# Altium PCB Shield_MMA8452_rouge.PcbDoc
Units mm, origin at the board's own origin, x right, y up, seen from the top; angles counter-clockwise.
Board outline 70 x 57.5 mm, 4 copper layers (Top Layer, Internal Plane 1, Internal Plane 2, Bottom Layer), stack 0.462 mm thick; 7 components, 6 nets, 114 pads, 0 vias.
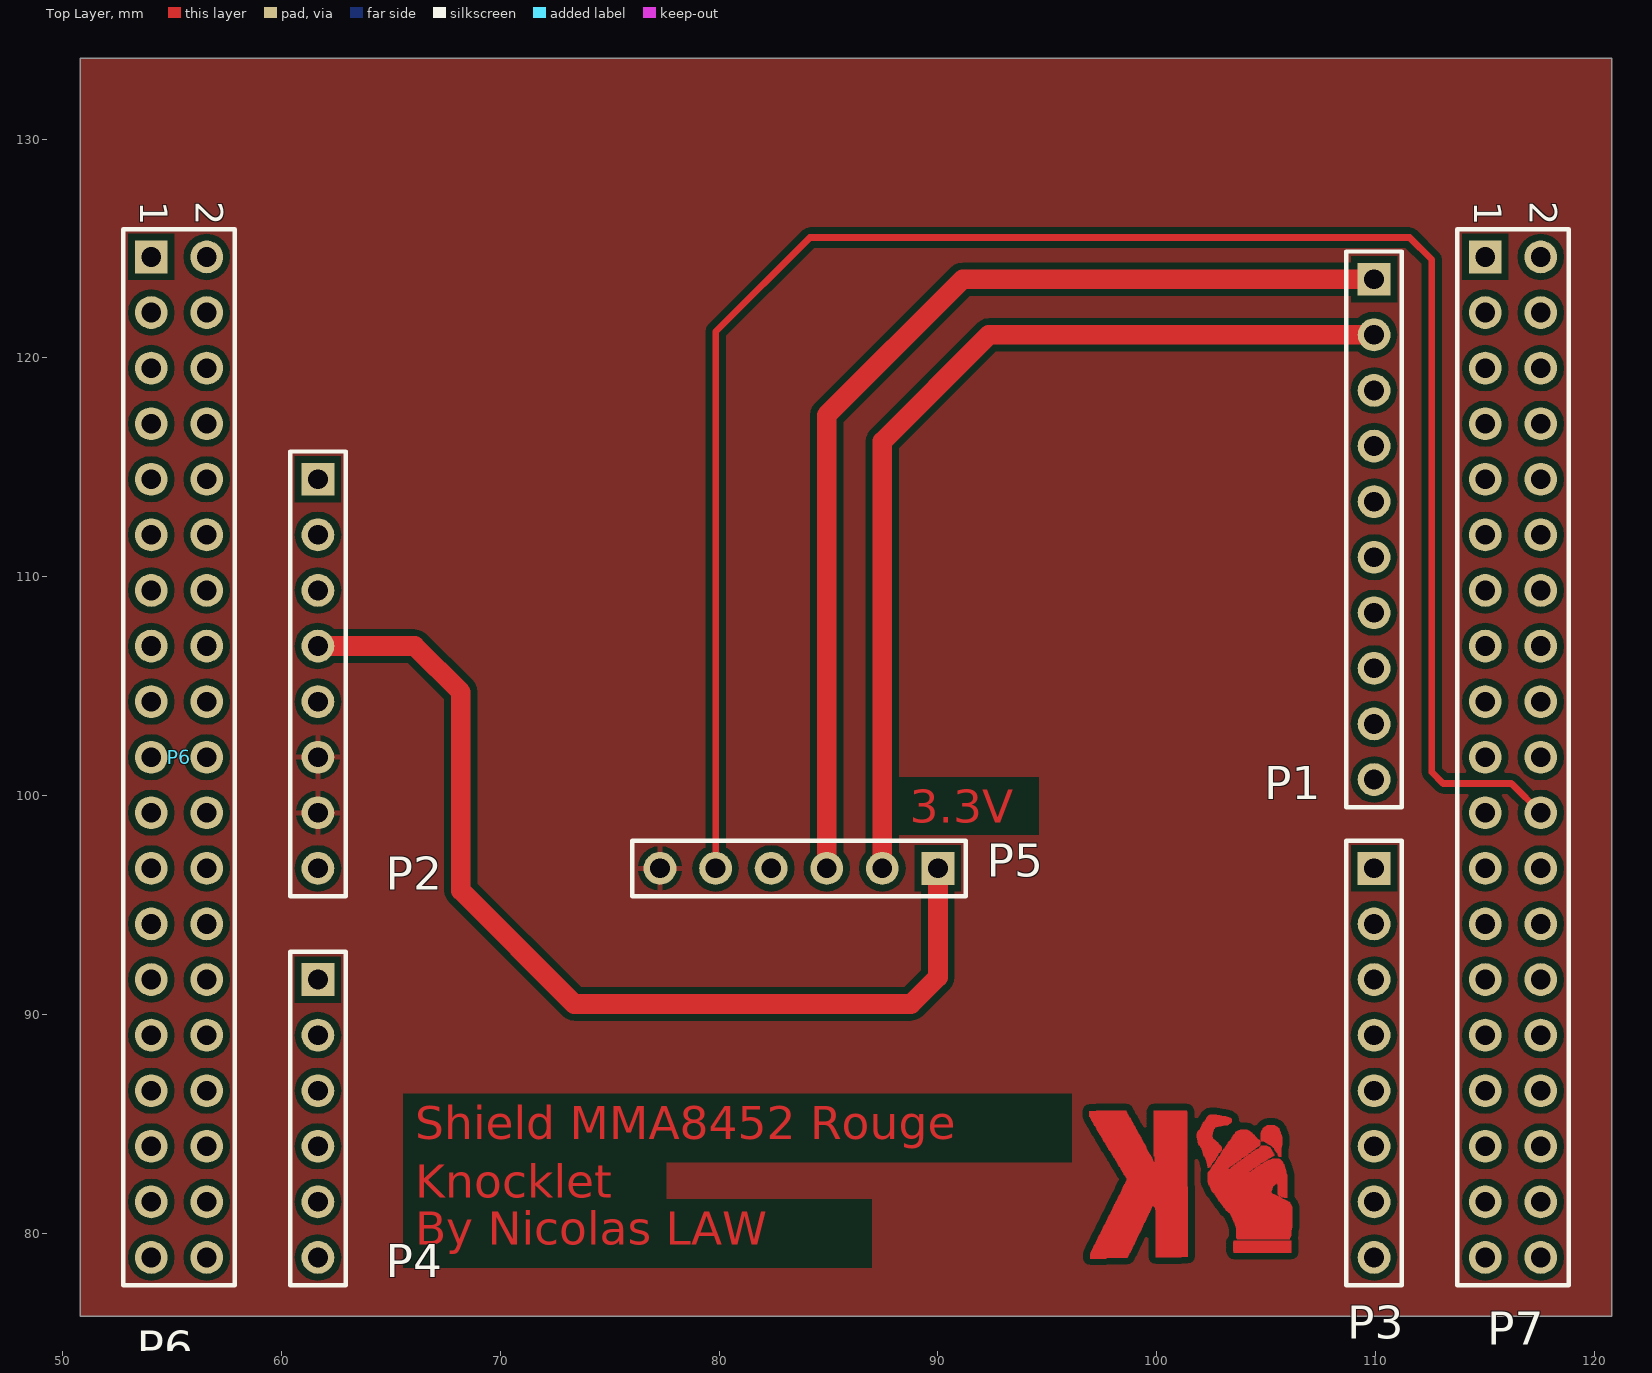
[diagram p0: Top Layer view]
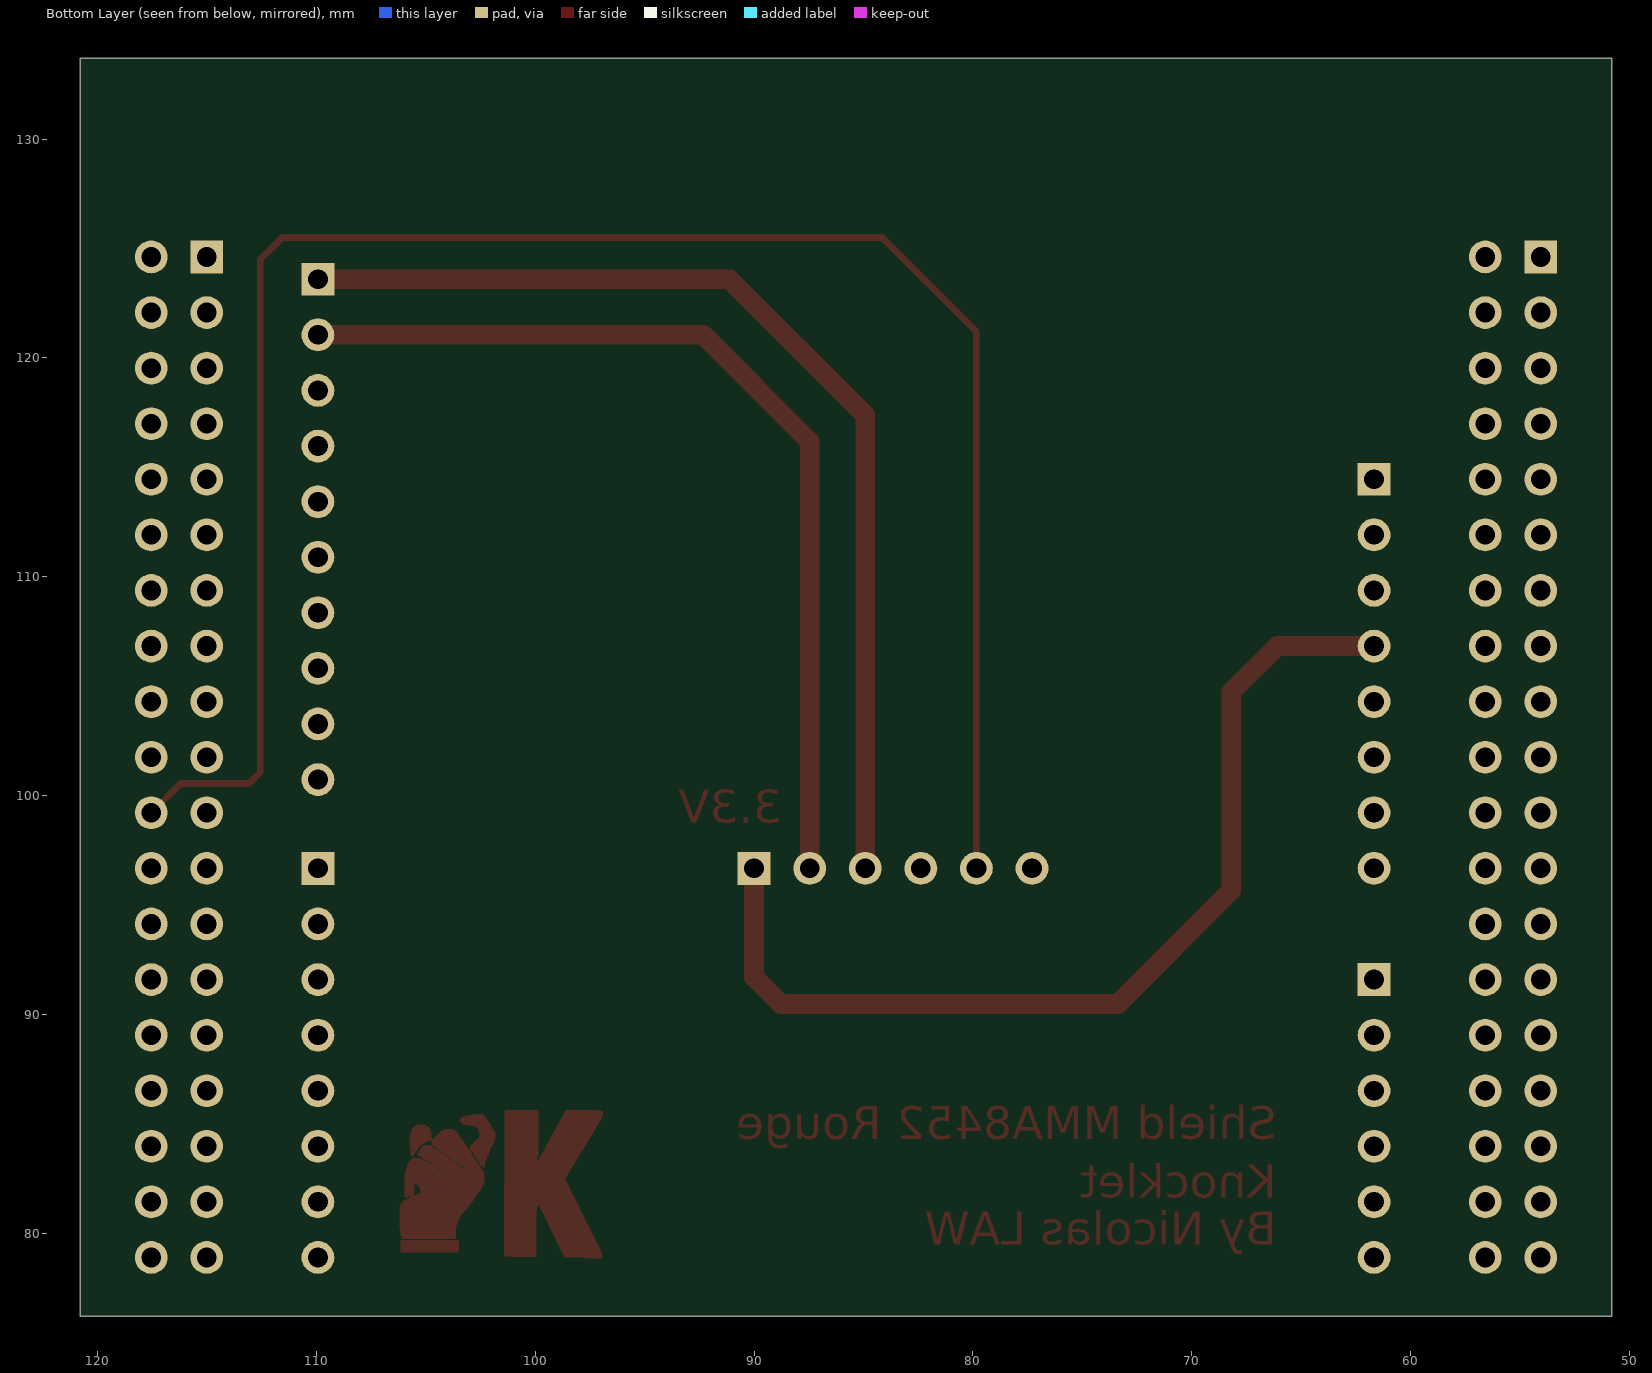
[diagram p1: Bottom Layer view, seen from below]
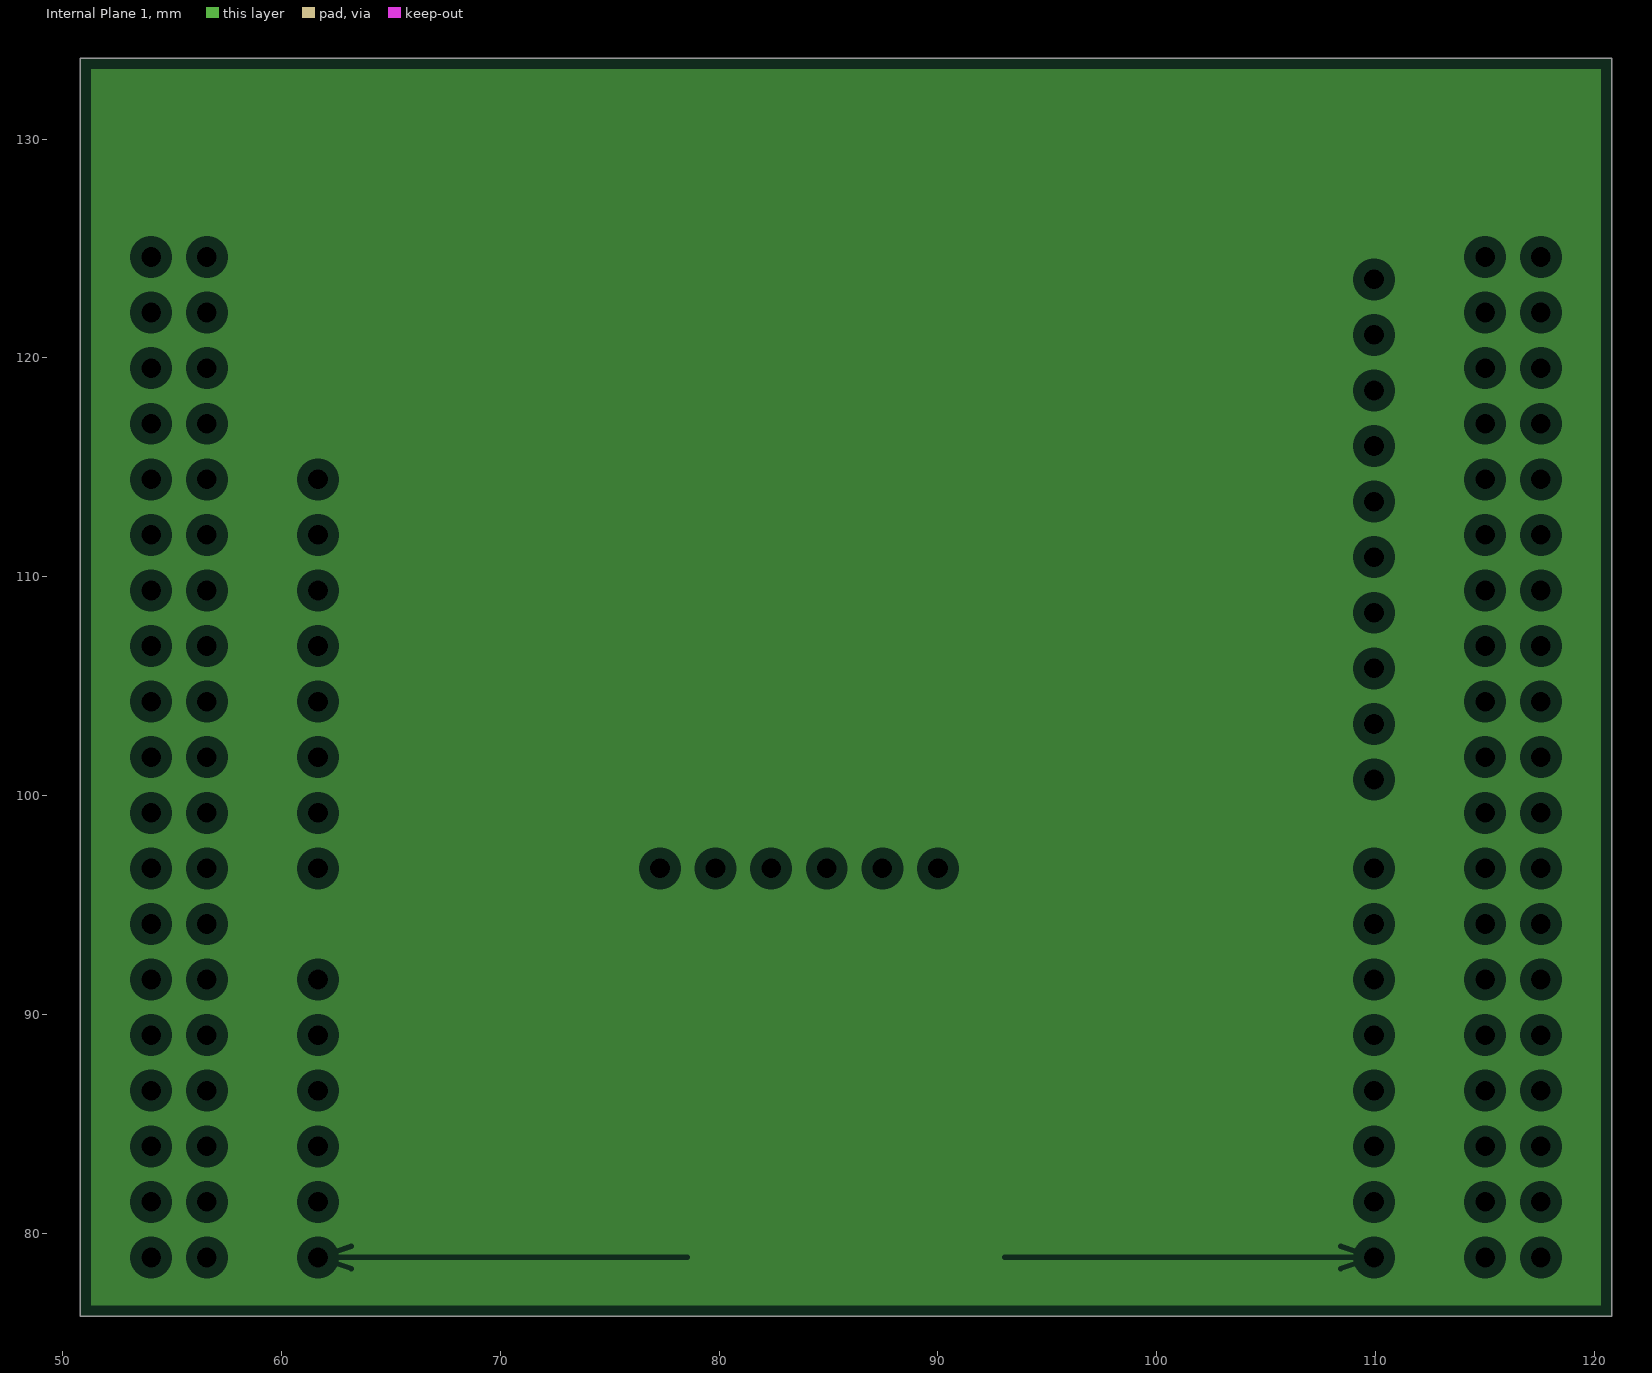
[diagram p2: Internal Plane 1, clearances drawn from the general rule]
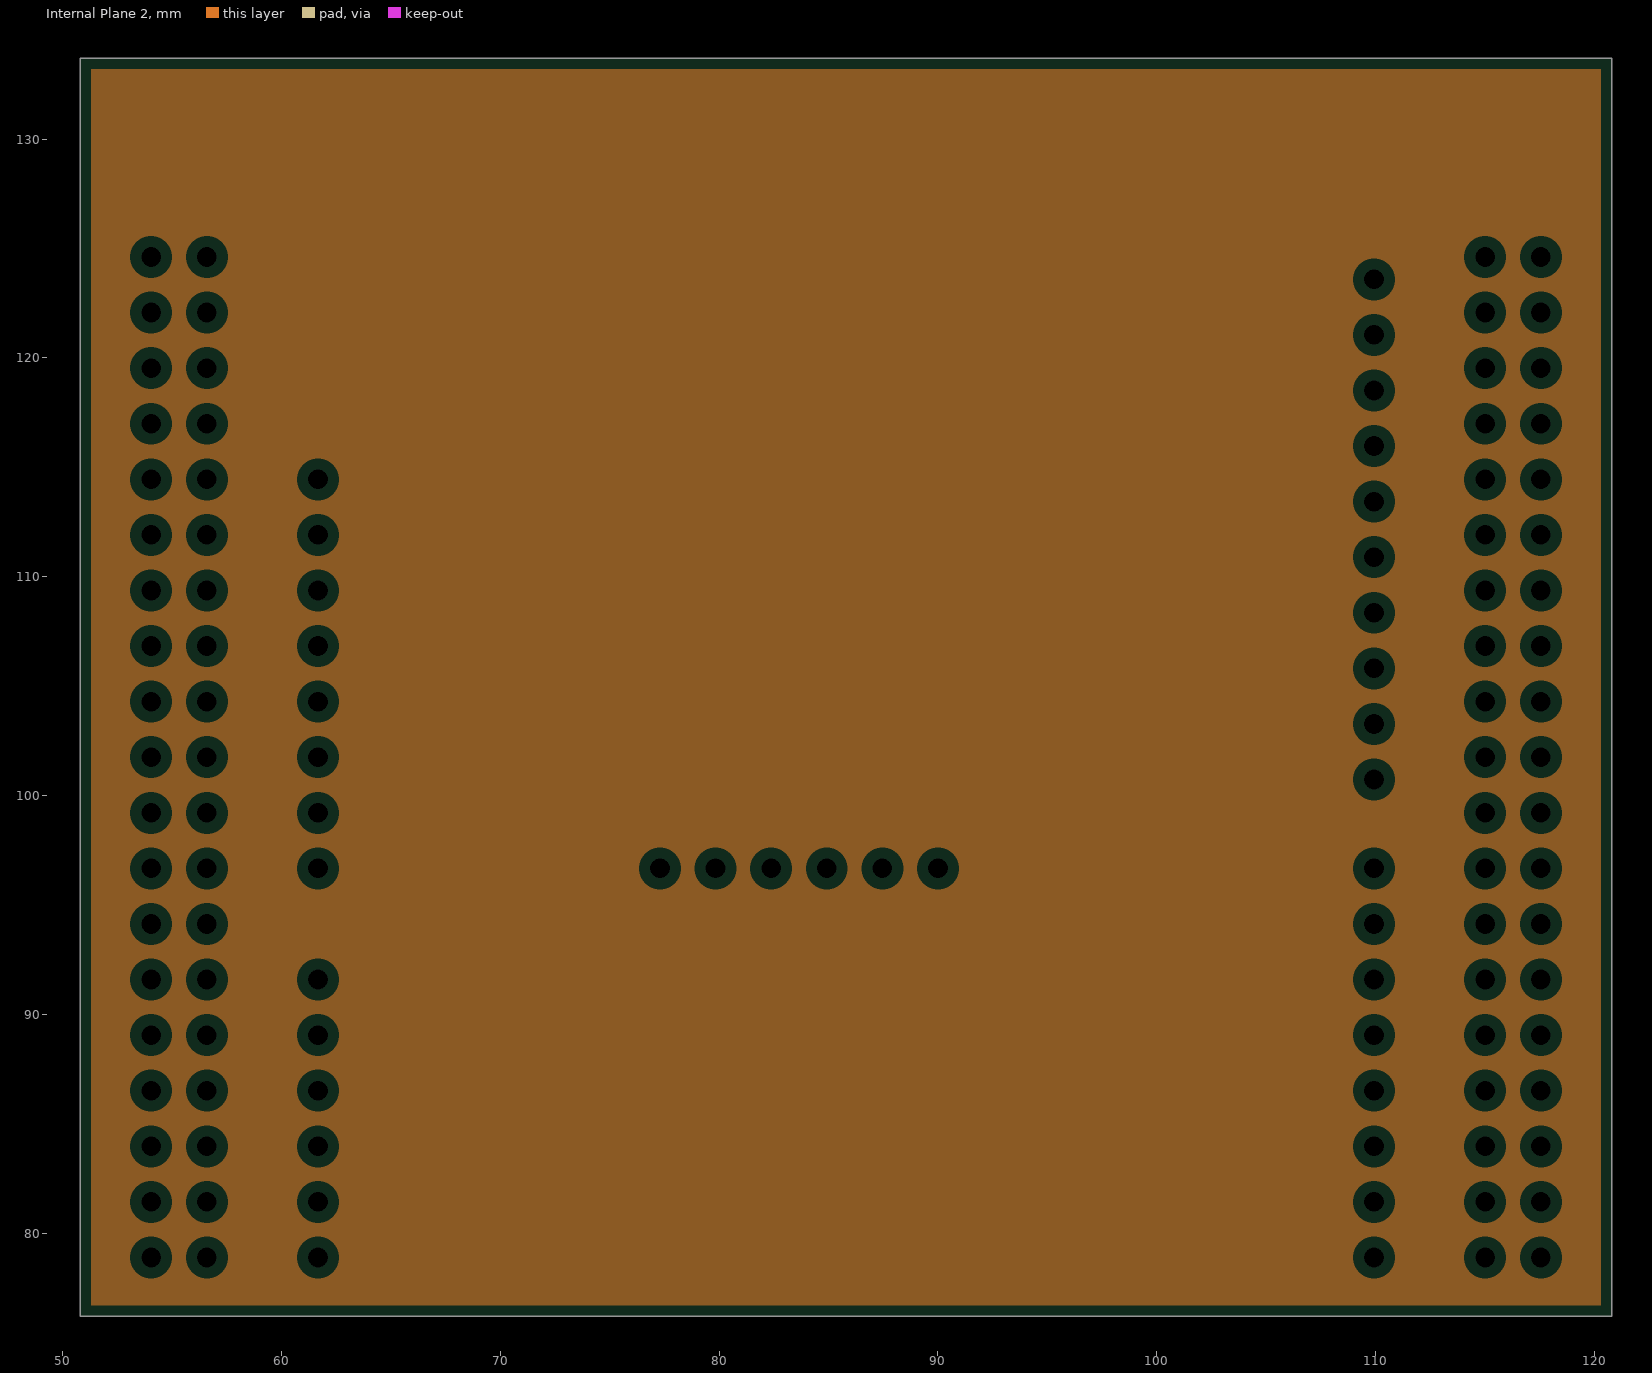
[diagram p3: Internal Plane 2, clearances drawn from the general rule]

## Layer stack, top to bottom
Top Solder: solder mask 0.0102, Solder Resist, Dk 3.5
Top Layer: signal copper 0.0356
Internal Plane 1: plane copper 0.0356
Internal Plane 2: plane copper 0.0356
Dielectric 1: dielectric 0.32, FR-4, Dk 4.8
Bottom Layer: signal copper 0.0356
Bottom Solder: solder mask 0.0102, Solder Resist, Dk 3.5

## Board outline
50.8,76.2 120.8,76.2 120.8,133.7 50.8,133.7

## Design rules (kind name [scope] priority, off if disabled: settings)
Clearance [All] p1: gap=0.3 ignorepadtopadclearanceinfootprint=FALSE except(0: Arc-Hole Track-Hole SMDPad-Hole THPad-Hole Via-Hole Fill-Hole Poly-Hole Region-Hole Text-Hole)
PlaneClearance [All] p1: clearance=0.508
PlaneConnect [All] p1: planeconnectstyle=Relief reliefexpansion=0.508 reliefentries=4 reliefconductorwidth=0.254 reliefairgap=0.254
PolygonConnect [All] p1: connectstyle=Relief reliefconductorwidth=0.254 reliefentries=4 polygonreliefangle="90 Angle" airgapwidth=0.254
RoutingVias [All] p1: holewidth=0.8 width=1.6 viastyle="Through Hole" minholewidth=0.711 minwidth=1.27 maxholewidth=0.711 maxwidth=1.27
SolderMaskExpansion [All] p1: expansion=0.102
Width [All] p1: maxlimit=0.9 minlimit=0.3 preferedwidth=0.3 bottomlayer_maxwidth=0.3 minimp=50.000000 maximp=50.000000 favimp=50.000000
28 further rules are at their usual default settings.

## Classes and differential pairs
component class Shield_MMA8452_rouge: P2 P3 P4 P6 P7

## Components (designator, comment, footprint, x,y, rotation, side; value= is the part's Value field where it differs from the comment)
P1 "CN5" HDR1X10 109.93,123.592 r270 top
P2 "CN6" HDR1X8 61.67,114.452 r270 top
P3 "CN9" HDR1X8 109.93,96.672 r270 top
P4 "CN8" HDR1X6 61.67,91.592 r270 top
P5 "MMA8452" HDR1X6 90,96.672 r180 top
P6 "CN7" HDR2X19 54.05,124.612 r270 top
P7 "CN10" HDR2X19 115.01,124.612 r270 top

## Footprints (in the part's own frame and the unit in brackets; to place one, negate y for a bottom-side part, rotate by r counter-clockwise, add the part's x,y. Pads: shape width x height; smd on the part's side, far side on the other; paste and mask are expansions set on the pad)
HDR1X6 [mm] "Connector; Header; 6 Position"
  rect 1.5x1.5 hole 0.9: 1(0,0)
  round 1.5 hole 0.9: 2(2.54,0) 3(5.08,0) 4(7.62,0) 5(10.16,0) 6(12.7,0)
  silkscreen extent -1.27,-1.27 13.97,1.27
HDR1X8 [mm] "Connector; Header; 8 Position"
  rect 1.5x1.5 hole 0.9: 1(0,0)
  round 1.5 hole 0.9: 2(2.54,0) 3(5.08,0) 4(7.62,0) 5(10.16,0) 6(12.7,0) 7(15.24,0) 8(17.78,0)
  silkscreen extent -1.27,-1.27 19.05,1.27
HDR1X10 [mm] "Connector; Header; 10 Position"
  rect 1.5x1.5 hole 0.9: 1(0,0)
  round 1.5 hole 0.9: 2(2.54,0) 3(5.08,0) 4(7.62,0) 5(10.16,0) 6(12.7,0) 7(15.24,0) 8(17.78,0) 9(20.32,0) 10(22.86,0)
  silkscreen extent -1.27,-1.27 24.13,1.27
HDR2X19 [mm] "Connector; Header; 19x2 Position"
  rect 1.5x1.5 hole 0.9: 1(0,0)
  round 1.5 hole 0.9: 2(0,2.54) 3(2.54,0) 4(2.54,2.54) 5(5.08,0) 6(5.08,2.54) 7(7.62,0) 8(7.62,2.54) 9(10.16,0) 10(10.16,2.54) 11(12.7,0) 12(12.7,2.54) 13(15.24,0) 14(15.24,2.54) 15(17.78,0) 16(17.78,2.54) 17(20.32,0) 18(20.32,2.54) 19(22.86,0) 20(22.86,2.54) 21(25.4,0) 22(25.4,2.54) 23(27.94,0) 24(27.94,2.54) 25(30.48,0) 26(30.48,2.54) 27(33.02,0) 28(33.02,2.54) 29(35.56,0) 30(35.56,2.54) 31(38.1,0) 32(38.1,2.54) 33(40.64,0) 34(40.64,2.54) 35(43.18,0) 36(43.18,2.54) 37(45.72,0) 38(45.72,2.54)
  silkscreen extent -1.27,-1.27 46.99,3.81

## Part data
P1: library part "Header 10", "Header, 10-Pin"
P2 P3: library part "Header 8", "Header, 8-Pin"
P4 P5: library part "Header 6", "Header, 6-Pin"
P6 P7: library part "Header 19X2", "Header, 19-Pin, Dual row"

## Nets (pads, with @x,y where several pads share a name; then routed paths per layer and width w, separated by ;. In a path a pad name is that pad's centre, name@x,y a point inside that pad or via, vN(x,y) a via of type N, cw(c..) or ccw(c..) an arc to the next point about the centre after c; other vN are vias at no path point)
3.3V: P2.4 P5.1 | length 45.9
  Top Layer w0.9: P2.4 66.091,106.832 68.199,104.724 68.199,95.656 73.381,90.475 88.773,90.475 90,91.702 P5.1
GND: P2.6 P2.7 P5.6
INT1: P5.5 P7.22 | length 88.6
  Top Layer w0.3: P5.5 79.84,121.191 84.15,125.501 111.557,125.501 112.573,124.485 112.573,101.067 113.087,100.552 116.21,100.552 P7.22
INT2: P5.4
SCL: P1.1 P5.3 | length 48.3
  Top Layer w0.9: P5.3 84.92,117.381 91.131,123.592 P1.1
SDA: P1.2 P5.2 | length 44
  Top Layer w0.9: P5.2 87.46,116.187 92.325,121.052 P1.2
pads on no net: P1.3 P1.4 P1.5 P1.6 P1.7 P1.8 P1.9 P1.10 P2.1 P2.2 P2.3 P2.5 P2.8 P3.1 P3.2 P3.3 P3.4 P3.5 P3.6 P3.7 P3.8 P4.1 P4.2 P4.3 P4.4 P4.5 P4.6 P6.1 P6.2 P6.3 P6.4 P6.5 P6.6 P6.7 P6.8 P6.9 P6.10 P6.11 P6.12 P6.13 P6.14 P6.15 P6.16 P6.17 P6.18 P6.19 P6.20 P6.21 P6.22 P6.23 P6.24 P6.25 P6.26 P6.27 P6.28 P6.29 P6.30 P6.31 P6.32 P6.33 P6.34 P6.35 P6.36 P6.37 P6.38 P7.1 P7.2 P7.3 P7.4 P7.5 P7.6 P7.7 P7.8 P7.9 P7.10 P7.11 P7.12 P7.13 P7.14 P7.15 P7.16 P7.17 P7.18 P7.19 P7.20 P7.21 P7.23 P7.24 P7.25 P7.26 P7.27 P7.28 P7.29 P7.30 P7.31 P7.32 P7.33 P7.34 P7.35 P7.36 P7.37 P7.38
copper on no net: | length 1528.3
  Top Layer w0.025: 96.926,85.344 98.73,85.344 ; 96.926,85.369 98.73,85.369 ; 96.926,85.395 98.704,85.395 ; 96.926,85.42 98.704,85.42 ; 96.926,85.446 98.679,85.446 ; 96.926,85.471 98.654,85.471 ; 96.926,85.496 98.654,85.496 ; 96.926,85.522 98.628,85.522 ; 96.926,85.547 98.628,85.547 ; 96.926,85.573 98.603,85.573 ; 96.952,78.867 97.688,78.867 ; 96.952,78.892 98.654,78.892 ; 96.952,78.918 98.679,78.918 ; 96.952,78.943 98.679,78.943 ; 96.952,78.969 98.704,78.969 ; 96.952,78.994 98.704,78.994 ; 96.952,79.019 98.73,79.019 ; 96.952,79.045 98.73,79.045 ; 96.952,79.07 98.755,79.07 ; 96.952,85.293 98.755,85.293 ; 96.952,85.319 98.755,85.319 ; 96.977,79.096 98.755,79.096 ; 96.977,79.121 98.781,79.121 ; 96.977,85.242 98.806,85.242 ; 96.977,85.268 98.781,85.268 ; 97.003,79.146 98.781,79.146 ; 97.003,79.172 98.806,79.172 ; 97.003,85.192 98.831,85.192 ; 97.003,85.217 98.806,85.217 ; 97.028,79.197 98.806,79.197 ; 97.028,79.223 98.831,79.223 ; 97.028,85.166 98.831,85.166 ; 97.053,79.248 98.831,79.248 ; 97.053,79.273 98.857,79.273 ; 97.053,85.115 98.857,85.115 ; 97.053,85.141 98.857,85.141 ; 97.079,79.299 98.857,79.299 ; 97.079,79.324 98.882,79.324 ; 97.079,85.09 98.882,85.09 ; 97.104,79.35 98.882,79.35 ; 97.104,79.375 98.908,79.375 ; 97.104,85.039 98.908,85.039 ; 97.104,85.065 98.908,85.065 ; 97.13,79.4 98.908,79.4 ; 97.13,79.426 98.933,79.426 ; 97.13,84.988 98.933,84.988 ; 97.13,85.014 98.933,85.014 ; 97.155,79.451 98.933,79.451 ; 97.155,79.477 98.958,79.477 ; 97.155,84.938 98.958,84.938 ; 97.155,84.963 98.958,84.963 ; 97.18,79.502 98.958,79.502 ; 97.18,79.527 98.984,79.527 ; 97.18,84.912 98.984,84.912 ; 97.206,79.553 98.984,79.553 ; 97.206,79.578 98.984,79.578 ; 97.206,84.861 99.009,84.861 ; 97.206,84.887 98.984,84.887 ; 97.231,79.604 99.009,79.604 ; 97.231,79.629 99.009,79.629 ; 97.231,84.811 99.035,84.811 ; 97.231,84.836 99.009,84.836 ; 97.231,85.598 98.603,85.598 ; 97.257,79.654 99.035,79.654 ; 97.257,79.68 99.035,79.68 ; 97.257,84.76 99.06,84.76 ; 97.257,84.785 99.035,84.785 ; 97.282,79.705 99.06,79.705 ; 97.282,79.731 99.06,79.731 ; 97.282,84.709 99.085,84.709 ; 97.282,84.734 99.085,84.734 ; 97.307,79.756 99.085,79.756 ; 97.307,79.781 99.085,79.781 ; 97.307,84.684 99.111,84.684 ; 97.333,79.807 99.111,79.807 ; 97.333,79.832 99.111,79.832 ; 97.333,84.633 99.136,84.633 ; 97.333,84.658 99.111,84.658 ; 97.358,79.858 99.136,79.858 ; 97.358,79.883 99.136,79.883 ; 97.358,84.607 99.136,84.607 ; 97.384,79.908 99.162,79.908 ; 97.384,79.934 99.162,79.934 ; 97.384,84.557 99.187,84.557 ; 97.384,84.582 99.162,84.582 ; 97.409,79.959 99.187,79.959 ; 97.409,79.985 99.187,79.985 ; 97.409,84.506 99.212,84.506 ; 97.409,84.531 99.187,84.531 ; 97.434,80.01 99.212,80.01 ; 97.434,80.035 99.212,80.035 ; 97.434,84.48 99.212,84.48 ; 97.46,80.061 99.238,80.061 ; 97.46,80.086 99.238,80.086 ; 97.46,84.43 99.238,84.43 ; 97.46,84.455 99.238,84.455 ; 97.485,80.112 99.263,80.112 ; 97.485,80.137 99.263,80.137 ; 97.485,84.379 99.289,84.379 ; 97.485,84.404 99.263,84.404 ; 97.511,80.162 99.289,80.162 ; 97.511,80.188 99.289,80.188 ; 97.511,84.353 99.289,84.353 ; 97.536,80.213 99.314,80.213 ; 97.536,80.239 99.314,80.239 ; 97.536,84.303 99.314,84.303 ; 97.536,84.328 99.314,84.328 ; 97.561,80.264 99.339,80.264 ; 97.561,80.289 99.339,80.289 ; 97.561,84.252 99.339,84.252 ; 97.561,84.277 99.339,84.277 ; 97.587,80.315 99.365,80.315 ; 97.587,80.34 99.365,80.34 ; 97.587,84.201 99.365,84.201 ; 97.587,84.226 99.365,84.226 ; 97.612,80.366 99.365,80.366 ; 97.612,80.391 99.39,80.391 ; 97.612,84.176 99.39,84.176 ; 97.638,80.416 99.39,80.416 ; 97.638,80.442 99.416,80.442 ; 97.638,84.125 99.416,84.125 ; 97.638,84.15 99.39,84.15 ; 97.663,80.467 99.416,80.467 ; 97.663,80.493 99.441,80.493 ; 97.663,84.074 99.441,84.074 ; 97.663,84.099 99.441,84.099 ; 97.688,80.518 99.441,80.518 ; 97.688,80.543 99.466,80.543 ; 97.688,84.049 99.466,84.049 ; 97.714,80.569 99.466,80.569 ; 97.714,80.594 99.492,80.594 ; 97.714,83.998 99.492,83.998 ; 97.714,84.023 99.466,84.023 ; 97.739,80.62 99.492,80.62 ; 97.739,80.645 99.517,80.645 ; 97.739,83.947 99.517,83.947 ; 97.739,83.972 99.492,83.972 ; 97.765,80.67 99.517,80.67 ; 97.765,80.696 99.543,80.696 ; 97.765,83.922 99.517,83.922 ; 97.79,80.721 99.543,80.721 ; 97.79,80.747 99.568,80.747 ; 97.79,83.871 99.543,83.871 ; 97.79,83.896 99.517,83.896 ; 97.815,80.772 99.568,80.772 ; 97.815,80.797 99.593,80.797 ; 97.815,83.845 99.543,83.845 ; 97.841,80.823 99.593,80.823 ; 97.841,80.848 99.619,80.848 ; 97.841,83.795 99.568,83.795 ; 97.841,83.82 99.568,83.82 ; 97.866,80.874 99.619,80.874 ; 97.866,80.899 99.644,80.899 ; 97.866,83.769 99.593,83.769 ; 97.892,80.924 99.644,80.924 ; 97.892,80.95 99.67,80.95 ; 97.892,83.718 99.619,83.718 ; 97.892,83.744 99.593,83.744 ; 97.917,80.975 99.67,80.975 ; 97.917,81.001 99.67,81.001 ; 97.917,83.693 99.644,83.693 ; 97.942,81.026 99.695,81.026 ; 97.942,81.051 99.695,81.051 ; 97.942,83.642 99.67,83.642 ; 97.942,83.668 99.644,83.668 ; 97.968,81.077 99.72,81.077 ; 97.968,81.102 99.72,81.102 ; 97.968,83.617 99.67,83.617 ; 97.993,81.128 99.746,81.128 ; 97.993,81.153 99.746,81.153 ; 97.993,83.566 99.72,83.566 ; 97.993,83.591 99.695,83.591 ; 98.019,81.178 99.771,81.178 ; 98.019,81.204 99.771,81.204 ; 98.019,83.515 99.746,83.515 ; 98.019,83.541 99.72,83.541 ; 98.044,81.229 99.797,81.229 ; 98.044,81.255 99.797,81.255 ; 98.044,83.464 99.771,83.464 ; 98.044,83.49 99.746,83.49 ; 98.069,81.28 99.822,81.28 ; 98.069,81.305 101.422,81.305 ; 98.069,81.331 101.422,81.331 ; 98.069,83.439 99.797,83.439 ; 98.095,81.356 101.422,81.356 ; 98.095,81.382 101.422,81.382 ; 98.095,83.388 99.822,83.388 ; 98.095,83.414 99.797,83.414 ; 98.12,81.407 101.422,81.407 ; 98.12,81.432 101.422,81.432 ; 98.12,83.337 99.822,83.337 ; 98.12,83.363 99.822,83.363 ; 98.146,81.458 101.422,81.458 ; 98.146,83.312 99.847,83.312 ; 98.171,81.483 101.422,81.483 ; 98.171,81.509 101.422,81.509 ; 98.171,83.261 99.873,83.261 ; 98.171,83.287 99.847,83.287 ; 98.196,81.534 101.422,81.534 ; 98.196,81.559 101.422,81.559 ; 98.196,83.21 101.397,83.21 ; 98.196,83.236 101.397,83.236 ; 98.222,81.585 101.422,81.585 ; 98.222,81.61 101.422,81.61 ; 98.222,83.185 101.397,83.185 ; 98.247,81.636 101.422,81.636 ; 98.247,81.661 101.422,81.661 ; 98.247,83.134 101.397,83.134 ; 98.247,83.16 101.397,83.16 ; 98.273,81.686 101.422,81.686 ; 98.273,81.712 101.422,81.712 ; 98.273,83.083 101.397,83.083 ; 98.273,83.109 101.397,83.109 ; 98.298,81.737 101.422,81.737 ; 98.298,81.763 101.422,81.763 ; 98.298,83.058 101.397,83.058 ; 98.323,81.788 101.422,81.788 ; 98.323,81.813 101.422,81.813 ; 98.323,83.007 101.397,83.007 ; 98.323,83.033 101.397,83.033 ; 98.349,81.839 101.422,81.839 ; 98.349,81.864 101.422,81.864 ; 98.349,82.956 101.397,82.956 ; 98.349,82.982 101.397,82.982 ; 98.374,81.89 101.422,81.89 ; 98.374,81.915 101.422,81.915 ; 98.374,82.931 101.397,82.931 ; 98.4,81.94 101.422,81.94 ; 98.4,81.966 101.422,81.966 ; 98.4,81.991 101.422,81.991 ; 98.4,82.88 101.397,82.88 ; 98.4,82.906 101.397,82.906 ; 98.425,82.017 101.422,82.017 ; 98.425,82.042 101.422,82.042 ; 98.425,82.829 101.397,82.829 ; 98.425,82.855 101.397,82.855 ; 98.45,82.067 101.422,82.067 ; 98.45,82.093 101.422,82.093 ; 98.45,82.804 101.397,82.804 ; 98.476,82.118 101.422,82.118 ; 98.476,82.144 101.397,82.144 ; 98.476,82.753 101.397,82.753 ; 98.476,82.779 101.397,82.779 ; 98.501,82.169 101.397,82.169 ; 98.501,82.194 101.397,82.194 ; 98.501,82.702 101.397,82.702 ; 98.501,82.728 101.397,82.728 ; 98.527,82.22 101.397,82.22 ; 98.527,82.245 101.397,82.245 ; 98.527,82.677 101.397,82.677 ; 98.552,82.271 101.397,82.271 ; 98.552,82.296 101.397,82.296 ; 98.552,82.626 101.397,82.626 ; 98.552,82.652 101.397,82.652 ; 98.577,82.321 101.397,82.321 ; 98.577,82.347 101.397,82.347 ; 98.577,82.575 101.397,82.575 ; 98.577,82.601 101.397,82.601 ; 98.603,82.372 101.397,82.372 ; 98.603,82.398 101.397,82.398 ; 98.603,82.55 101.397,82.55 ; 98.628,82.423 101.397,82.423 ; 98.628,82.448 101.397,82.448 ; 98.628,82.474 101.397,82.474 ; 98.628,82.499 101.397,82.499 ; 98.628,82.525 101.397,82.525 ; 99.847,81.28 101.422,81.28 ; 99.873,81.229 101.422,81.229 ; 99.873,81.255 101.422,81.255 ; 99.873,83.541 101.397,83.541 ; 99.873,83.566 101.397,83.566 ; 99.873,83.591 101.397,83.591 ; 99.873,83.617 101.397,83.617 ; 99.873,83.642 101.397,83.642 ; 99.873,83.668 101.397,83.668 ; 99.873,83.693 101.397,83.693 ; 99.873,83.718 101.397,83.718 ; 99.873,83.744 101.397,83.744 ; 99.873,83.769 101.397,83.769 ; 99.873,83.795 101.397,83.795 ; 99.873,83.82 101.397,83.82 ; 99.873,83.845 101.397,83.845 ; 99.873,83.871 101.397,83.871 ; 99.873,83.896 101.397,83.896 ; 99.873,83.922 101.397,83.922 ; 99.873,83.947 101.397,83.947 ; 99.873,83.972 101.397,83.972 ; 99.873,83.998 101.397,83.998 ; 99.873,84.023 101.397,84.023 ; 99.873,84.049 101.397,84.049 ; 99.873,84.074 101.397,84.074 ; 99.873,84.099 101.397,84.099 ; 99.873,84.125 101.397,84.125 ; 99.873,84.15 101.397,84.15 ; 99.873,84.176 101.397,84.176 ; 99.873,84.201 101.397,84.201 ; 99.873,84.226 101.397,84.226 ; 99.873,84.252 101.397,84.252 ; 99.873,84.277 101.397,84.277 ; 99.873,84.303 101.397,84.303 ; 99.873,84.328 101.397,84.328 ; 99.873,84.353 101.397,84.353 ; 99.873,84.379 101.397,84.379 ; 99.873,84.404 101.397,84.404 ; 99.873,84.43 101.397,84.43 ; 99.873,84.455 101.397,84.455 ; 99.873,84.48 101.397,84.48 ; 99.873,84.506 101.397,84.506 ; 99.873,84.531 101.397,84.531 ; 99.873,84.557 101.397,84.557 ; 99.873,84.582 101.397,84.582 ; 99.873,84.607 101.397,84.607 ; 99.873,84.633 101.397,84.633 ; 99.873,84.658 101.397,84.658 ; 99.873,84.684 101.397,84.684 ; 99.873,84.709 101.397,84.709 ; 99.873,84.734 101.397,84.734 ; 99.873,84.76 101.397,84.76 ; 99.873,84.785 101.397,84.785 ; 99.873,84.811 101.397,84.811 ; 99.873,84.836 101.397,84.836 ; 99.873,84.861 101.397,84.861 ; 99.873,84.887 101.397,84.887 ; 99.873,84.912 101.397,84.912 ; 99.873,84.938 101.397,84.938 ; 99.873,84.963 101.397,84.963 ; 99.873,84.988 101.397,84.988 ; 99.873,85.014 101.397,85.014 ; 99.873,85.039 101.397,85.039 ; 99.873,85.065 101.397,85.065 ; 99.873,85.09 101.397,85.09 ; 99.873,85.115 101.397,85.115 ; 99.873,85.141 101.397,85.141 ; 99.873,85.166 101.397,85.166 ; 99.873,85.192 101.397,85.192 ; 99.873,85.217 101.397,85.217 ; 99.873,85.242 101.397,85.242 ; 99.873,85.268 101.397,85.268 ; 99.873,85.293 101.397,85.293 ; 99.873,85.319 101.397,85.319 ; 99.873,85.344 101.397,85.344 ; 99.873,85.369 101.397,85.369 ; 99.873,85.395 101.397,85.395 ; 99.873,85.42 101.397,85.42 ; 99.873,85.446 101.397,85.446 ; 99.873,85.471 101.397,85.471 ; 99.873,85.496 101.397,85.496 ; 99.873,85.522 101.397,85.522 ; 99.873,85.547 101.397,85.547 ; 99.873,85.573 101.371,85.573 ; 99.873,85.598 101.371,85.598 ; 99.898,81.178 101.422,81.178 ; 99.898,81.204 101.422,81.204 ; 99.898,83.261 101.397,83.261 ; 99.898,83.287 101.397,83.287 ; 99.898,83.312 101.397,83.312 ; 99.898,83.337 101.397,83.337 ; 99.898,83.363 101.397,83.363 ; 99.898,83.388 101.397,83.388 ; 99.898,83.414 101.397,83.414 ; 99.898,83.439 101.397,83.439 ; 99.898,83.464 101.397,83.464 ; 99.898,83.49 101.397,83.49 ; 99.898,83.515 101.397,83.515 ; 99.924,81.102 101.422,81.102 ; 99.924,81.128 101.422,81.128 ; 99.924,81.153 101.422,81.153 ; 99.949,78.918 101.117,78.918 ; 99.949,78.943 101.422,78.943 ; 99.949,78.969 101.422,78.969 ; 99.949,78.994 101.422,78.994 ; 99.949,79.019 101.422,79.019 ; 99.949,79.045 101.422,79.045 ; 99.949,79.07 101.422,79.07 ; 99.949,79.096 101.422,79.096 ; 99.949,79.121 101.422,79.121 ; 99.949,79.146 101.422,79.146 ; 99.949,79.172 101.422,79.172 ; 99.949,79.197 101.422,79.197 ; 99.949,79.223 101.422,79.223 ; 99.949,79.248 101.422,79.248 ; 99.949,79.273 101.422,79.273 ; 99.949,79.299 101.422,79.299 ; 99.949,79.324 101.422,79.324 ; 99.949,79.35 101.422,79.35 ; 99.949,79.375 101.422,79.375 ; 99.949,79.4 101.422,79.4 ; 99.949,79.426 101.422,79.426 ; 99.949,79.451 101.422,79.451 ; 99.949,79.477 101.422,79.477 ; 99.949,79.502 101.422,79.502 ; 99.949,79.527 101.422,79.527 ; 99.949,79.553 101.422,79.553 ; 99.949,79.578 101.422,79.578 ; 99.949,79.604 101.422,79.604 ; 99.949,79.629 101.422,79.629 ; 99.949,79.654 101.422,79.654 ; 99.949,79.68 101.422,79.68 ; 99.949,79.705 101.422,79.705 ; 99.949,79.731 101.422,79.731 ; 99.949,79.756 101.422,79.756 ; 99.949,79.781 101.422,79.781 ; 99.949,79.807 101.422,79.807 ; 99.949,79.832 101.422,79.832 ; 99.949,79.858 101.422,79.858 ; 99.949,79.883 101.422,79.883 ; 99.949,79.908 101.422,79.908 ; 99.949,79.934 101.422,79.934 ; 99.949,79.959 101.422,79.959 ; 99.949,79.985 101.422,79.985 ; 99.949,80.01 101.422,80.01 ; 99.949,80.035 101.422,80.035 ; 99.949,80.061 101.422,80.061 ; 99.949,80.086 101.422,80.086 ; 99.949,80.112 101.422,80.112 ; 99.949,80.137 101.422,80.137 ; 99.949,80.162 101.422,80.162 ; 99.949,80.188 101.422,80.188 ; 99.949,80.213 101.422,80.213 ; 99.949,80.239 101.422,80.239 ; 99.949,80.264 101.422,80.264 ; 99.949,80.289 101.422,80.289 ; 99.949,80.315 101.422,80.315 ; 99.949,80.34 101.422,80.34 ; 99.949,80.366 101.422,80.366 ; 99.949,80.391 101.422,80.391 ; 99.949,80.416 101.422,80.416 ; 99.949,80.442 101.422,80.442 ; 99.949,80.467 101.422,80.467 ; 99.949,80.493 101.422,80.493 ; 99.949,80.518 101.422,80.518 ; 99.949,80.543 101.422,80.543 ; 99.949,80.569 101.422,80.569 ; 99.949,80.594 101.422,80.594 ; 99.949,80.62 101.422,80.62 ; 99.949,80.645 101.422,80.645 ; 99.949,80.67 101.422,80.67 ; 99.949,80.696 101.422,80.696 ; 99.949,80.721 101.422,80.721 ; 99.949,80.747 101.422,80.747 ; 99.949,80.772 101.422,80.772 ; 99.949,80.797 101.422,80.797 ; 99.949,80.823 101.422,80.823 ; 99.949,80.848 101.422,80.848 ; 99.949,80.874 101.422,80.874 ; 99.949,80.899 101.422,80.899 ; 99.949,80.924 101.422,80.924 ; 99.949,80.95 101.422,80.95 ; 99.949,80.975 101.422,80.975 ; 99.949,81.001 101.422,81.001 ; 99.949,81.026 101.422,81.026 ; 99.949,81.051 101.422,81.051 ; 99.949,81.077 101.422,81.077 ; 101.829,84.379 102.565,84.379 ; 101.829,84.404 102.54,84.404 ; 101.829,84.43 102.54,84.43 ; 101.829,84.455 102.54,84.455 ; 101.829,84.48 102.54,84.48 ; 101.829,84.506 102.54,84.506 ; 101.829,84.531 102.54,84.531 ; 101.829,84.557 102.565,84.557 ; 101.854,84.303 102.616,84.303 ; 101.854,84.328 102.591,84.328 ; 101.854,84.353 102.565,84.353 ; 101.854,84.582 102.565,84.582 ; 101.854,84.607 102.565,84.607 ; 101.879,84.15 102.794,84.15 ; 101.879,84.176 102.743,84.176 ; 101.879,84.201 102.718,84.201 ; 101.879,84.226 102.692,84.226 ; 101.879,84.252 102.667,84.252 ; 101.879,84.277 102.641,84.277 ; 101.879,84.633 102.565,84.633 ; 101.879,84.658 102.591,84.658 ; 101.905,84.099 102.845,84.099 ; 101.905,84.125 102.819,84.125 ; 101.905,84.684 102.591,84.684 ; 101.93,84.049 102.87,84.049 ; 101.93,84.074 102.845,84.074 ; 101.93,84.709 102.591,84.709 ; 101.956,84.023 102.895,84.023 ; 101.956,84.734 102.616,84.734 ; 101.956,84.76 102.616,84.76 ; 101.981,83.972 102.946,83.972 ; 101.981,83.998 102.921,83.998 ; 101.981,84.785 102.641,84.785 ; 102.006,83.922 102.972,83.922 ; 102.006,83.947 102.946,83.947 ; 102.006,84.811 102.641,84.811 ; 102.006,84.836 102.641,84.836 ; 102.032,83.896 102.972,83.896 ; 102.032,84.861 102.718,84.861 ; 102.032,84.887 102.819,84.887 ; 102.057,83.845 102.972,83.845 ; 102.057,83.871 102.972,83.871 ; 102.057,84.912 102.946,84.912 ; 102.057,84.938 103.048,84.938 ; 102.057,84.963 103.251,84.963 ; 102.083,83.769 102.921,83.769 ; 102.083,83.795 102.946,83.795 ; 102.083,83.82 102.972,83.82 ; 102.083,84.988 103.302,84.988 ; 102.108,83.668 102.845,83.668 ; 102.108,83.693 102.87,83.693 ; 102.108,83.718 102.895,83.718 ; 102.108,83.744 102.895,83.744 ; 102.108,85.014 103.327,85.014 ; 102.108,85.039 103.378,85.039 ; 102.133,83.591 102.794,83.591 ; 102.133,83.617 102.819,83.617 ; 102.133,83.642 102.819,83.642 ; 102.133,85.065 103.403,85.065 ; 102.159,83.541 102.768,83.541 ; 102.159,83.566 102.794,83.566 ; 102.159,85.09 103.403,85.09 ; 102.184,83.49 102.743,83.49 ; 102.184,83.515 102.743,83.515 ; 102.184,85.115 103.429,85.115 ; 102.184,85.141 103.429,85.141 ; 102.21,83.439 102.692,83.439 ; 102.21,83.464 102.718,83.464 ; 102.21,85.166 103.429,85.166 ; 102.235,83.388 102.667,83.388 ; 102.235,83.414 102.692,83.414 ; 102.235,85.192 103.429,85.192 ; 102.235,85.217 103.429,85.217 ; 102.26,83.312 102.616,83.312 ; 102.26,83.337 102.641,83.337 ; 102.26,83.363 102.641,83.363 ; 102.26,85.242 103.403,85.242 ; 102.286,83.21 102.54,83.21 ; 102.286,83.236 102.565,83.236 ; 102.286,83.261 102.591,83.261 ; 102.286,83.287 102.591,83.287 ; 102.286,85.268 103.353,85.268 ; 102.286,85.293 103.302,85.293 ; 102.311,83.109 102.464,83.109 ; 102.311,83.134 102.489,83.134 ; 102.311,83.16 102.514,83.16 ; 102.311,83.185 102.514,83.185 ; 102.311,85.319 103.226,85.319 ; 102.337,82.347 105.969,82.347 ; 102.337,82.372 105.969,82.372 ; 102.337,82.398 105.969,82.398 ; 102.337,82.423 105.969,82.423 ; 102.337,82.448 105.969,82.448 ; 102.337,82.474 105.969,82.474 ; 102.337,82.499 105.969,82.499 ; 102.337,82.525 105.969,82.525 ; 102.337,82.55 105.969,82.55 ; 102.337,82.575 105.969,82.575 ; 102.337,82.601 105.969,82.601 ; 102.337,82.626 105.969,82.626 ; 102.337,82.652 105.969,82.652 ; 102.337,82.677 105.969,82.677 ; 102.337,82.702 105.943,82.702 ; 102.337,82.728 105.943,82.728 ; 102.337,82.753 105.918,82.753 ; 102.337,83.007 102.387,83.007 ; 102.337,83.033 102.438,83.033 ; 102.337,83.058 102.438,83.058 ; 102.337,83.083 102.464,83.083 ; 102.337,85.344 103.149,85.344 ; 102.362,82.271 105.435,82.271 ; 102.362,82.296 105.969,82.296 ; 102.362,82.321 105.969,82.321 ; 102.362,82.779 105.918,82.779 ; 102.362,85.369 102.972,85.369 ; 102.387,82.22 105.359,82.22 ; 102.387,82.245 105.385,82.245 ; 102.387,82.804 104.191,82.804 ; 102.387,82.829 104.216,82.829 ; 102.387,85.395 102.87,85.395 ; 102.413,82.144 105.308,82.144 ; 102.413,82.169 105.334,82.169 ; 102.413,82.194 105.359,82.194 ; 102.413,82.855 104.267,82.855 ; 102.413,82.88 104.292,82.88 ; 102.413,85.42 102.743,85.42 ; 102.438,82.093 105.308,82.093 ; 102.438,82.118 105.308,82.118 ; 102.438,82.906 104.318,82.906 ; 102.464,82.042 105.283,82.042 ; 102.464,82.067 105.283,82.067 ; 102.464,82.931 104.369,82.931 ; 102.464,82.956 103.276,82.956 ; 102.489,81.991 105.258,81.991 ; 102.489,82.017 105.283,82.017 ; 102.489,82.982 103.302,82.982 ; 102.514,81.94 105.232,81.94 ; 102.514,81.966 105.258,81.966 ; 102.514,83.007 103.302,83.007 ; 102.514,83.033 103.327,83.033 ; 102.54,81.915 105.232,81.915 ; 102.54,83.058 103.353,83.058 ; 102.565,81.89 105.232,81.89 ; 102.565,83.083 103.403,83.083 ; 102.565,83.109 103.429,83.109 ; 102.591,81.864 105.232,81.864 ; 102.591,83.134 103.48,83.134 ; 102.616,81.839 105.258,81.839 ; 102.616,83.16 103.505,83.16 ; 102.641,81.788 105.359,81.788 ; 102.641,81.813 105.308,81.813 ; 102.641,83.185 103.556,83.185 ; 102.641,83.21 103.581,83.21 ; 102.667,81.763 105.41,81.763 ; 102.667,83.236 103.607,83.236 ; 102.692,81.712 105.512,81.712 ; 102.692,81.737 105.461,81.737 ; 102.692,83.261 103.657,83.261 ; 102.692,83.287 103.683,83.287 ; 102.718,81.686 105.562,81.686 ; 102.718,83.312 103.734,83.312 ; 102.718,83.337 103.759,83.337 ; 102.743,81.636 105.664,81.636 ; 102.743,81.661 105.613,81.661 ; 102.743,83.363 103.784,83.363 ; 102.768,81.61 105.715,81.61 ; 102.768,83.388 103.835,83.388 ; 102.768,83.414 103.861,83.414 ; 102.794,81.585 105.766,81.585 ; 102.794,83.439 103.886,83.439 ; 102.819,81.534 105.867,81.534 ; 102.819,81.559 105.816,81.559 ; 102.819,83.464 103.937,83.464 ; 102.845,81.483 105.969,81.483 ; 102.845,81.509 105.918,81.509 ; 102.845,83.49 103.962,83.49 ; 102.845,83.515 104.013,83.515 ; 102.87,81.458 105.994,81.458 ; 102.87,83.541 104.038,83.541 ; 102.895,81.407 106.07,81.407 ; 102.895,81.432 106.045,81.432 ; 102.895,83.566 104.089,83.566 ; 102.895,83.591 104.115,83.591 ; 102.921,81.382 106.096,81.382 ; 102.921,83.617 104.165,83.617 ; 102.921,83.642 104.191,83.642 ; 102.946,81.356 106.096,81.356 ; 102.946,83.668 104.216,83.668 ; 102.972,83.693 104.267,83.693 ; 102.972,83.718 104.292,83.718 ; 102.997,81.305 106.147,81.305 ; 102.997,81.331 106.121,81.331 ; 102.997,83.744 104.318,83.744 ; 102.997,83.769 104.343,83.769 ; 103.022,81.28 106.147,81.28 ; 103.022,83.795 104.394,83.795 ; 103.048,81.229 106.172,81.229 ; 103.048,81.255 106.172,81.255 ; 103.048,83.82 104.419,83.82 ; 103.048,83.845 104.445,83.845 ; 103.073,81.178 106.197,81.178 ; 103.073,81.204 106.197,81.204 ; 103.073,83.871 104.496,83.871 ; 103.099,81.153 106.197,81.153 ; 103.099,83.896 104.521,83.896 ; 103.124,81.128 106.197,81.128 ; 103.124,83.922 104.572,83.922 ; 103.124,83.947 104.597,83.947 ; 103.149,81.077 106.197,81.077 ; 103.149,81.102 106.197,81.102 ; 103.149,83.972 104.648,83.972 ; 103.175,81.051 106.197,81.051 ; 103.175,83.998 104.673,83.998 ; 103.175,84.023 104.699,84.023 ; 103.2,84.049 104.724,84.049 ; 103.226,81.026 106.197,81.026 ; 103.226,84.074 104.724,84.074 ; 103.251,81.001 106.197,81.001 ; 103.251,84.099 104.724,84.099 ; 103.251,84.125 104.724,84.125 ; 103.276,80.975 106.197,80.975 ; 103.276,84.15 104.724,84.15 ; 103.302,80.95 106.197,80.95 ; 103.302,84.176 104.724,84.176 ; 103.302,84.201 104.724,84.201 ; 103.327,80.924 106.197,80.924 ; 103.327,82.956 104.394,82.956 ; 103.327,84.226 104.699,84.226 ; 103.353,80.899 106.197,80.899 ; 103.353,84.252 104.699,84.252 ; 103.378,80.848 106.197,80.848 ; 103.378,80.874 106.197,80.874 ; 103.378,82.982 104.445,82.982 ; 103.378,84.277 104.673,84.277 ; 103.378,84.303 104.648,84.303 ; 103.403,80.797 106.197,80.797 ; 103.403,80.823 106.197,80.823 ; 103.403,83.007 104.47,83.007 ; 103.403,84.328 104.623,84.328 ; 103.429,80.747 106.197,80.747 ; 103.429,80.772 106.197,80.772 ; 103.429,84.353 104.572,84.353 ; 103.429,84.379 104.546,84.379 ; 103.454,80.696 106.197,80.696 ; 103.454,80.721 106.197,80.721 ; 103.454,83.033 104.496,83.033 ; 103.454,84.404 104.521,84.404 ; 103.48,80.645 106.197,80.645 ; 103.48,80.67 106.197,80.67 ; 103.48,83.058 104.546,83.058 ; 103.48,84.43 104.496,84.43 ; 103.48,84.455 104.47,84.455 ; 103.505,79.197 106.147,79.197 ; 103.505,79.223 106.147,79.223 ; 103.505,79.248 106.147,79.248 ; 103.505,79.273 106.147,79.273 ; 103.505,79.299 106.147,79.299 ; 103.505,79.324 106.147,79.324 ; 103.505,79.35 106.147,79.35 ; 103.505,79.375 106.147,79.375 ; 103.505,79.4 106.147,79.4 ; 103.505,79.426 106.147,79.426 ; 103.505,79.451 106.147,79.451 ; 103.505,79.477 106.147,79.477 ; 103.505,79.502 106.147,79.502 ; 103.505,79.527 106.147,79.527 ; 103.505,79.553 106.147,79.553 ; 103.505,79.578 106.147,79.578 ; 103.505,79.604 106.147,79.604 ; 103.505,80.594 106.197,80.594 ; 103.505,80.62 106.197,80.62 ; 103.505,83.083 104.572,83.083 ; 103.505,84.48 104.47,84.48 ; 103.53,79.121 106.147,79.121 ; 103.53,79.146 106.147,79.146 ; 103.53,79.172 106.147,79.172 ; 103.53,79.629 106.147,79.629 ; 103.53,79.654 106.147,79.654 ; 103.53,80.518 106.197,80.518 ; 103.53,80.543 106.197,80.543 ; 103.53,80.569 106.197,80.569 ; 103.53,83.109 104.623,83.109 ; 103.53,84.506 104.445,84.506 ; 103.53,84.531 104.419,84.531 ; 103.556,80.442 106.197,80.442 ; 103.556,80.467 106.197,80.467 ; 103.556,80.493 106.197,80.493 ; 103.556,83.134 104.648,83.134 ; 103.556,84.557 104.394,84.557 ; 103.581,80.366 106.197,80.366 ; 103.581,80.391 106.197,80.391 ; 103.581,80.416 106.197,80.416 ; 103.581,84.582 104.369,84.582 ; 103.581,84.607 104.318,84.607 ; 103.607,80.289 106.197,80.289 ; 103.607,80.315 106.197,80.315 ; 103.607,80.34 106.197,80.34 ; 103.607,83.16 104.699,83.16 ; 103.607,84.633 104.292,84.633 ; 103.632,79.781 106.07,79.781 ; 103.632,79.807 106.096,79.807 ; 103.632,79.832 106.096,79.832 ; 103.632,79.858 106.121,79.858 ; 103.632,79.883 106.121,79.883 ; 103.632,79.908 106.147,79.908 ; 103.632,79.934 106.147,79.934 ; 103.632,79.959 106.147,79.959 ; 103.632,79.985 106.147,79.985 ; 103.632,80.01 106.147,80.01 ; 103.632,80.035 106.147,80.035 ; 103.632,80.061 106.147,80.061 ; 103.632,80.086 106.147,80.086 ; 103.632,80.112 106.147,80.112 ; 103.632,80.137 106.147,80.137 ; 103.632,80.162 106.147,80.162 ; 103.632,80.188 106.172,80.188 ; 103.632,80.213 106.172,80.213 ; 103.632,80.239 106.172,80.239 ; 103.632,80.264 106.197,80.264 ; 103.632,83.185 104.724,83.185 ; 103.657,83.21 104.775,83.21 ; 103.657,84.658 104.242,84.658 ; 103.683,79.756 106.07,79.756 ; 103.708,83.236 104.826,83.236 ; 103.708,84.684 104.216,84.684 ; 103.734,83.261 104.851,83.261 ; 103.759,84.709 104.191,84.709 ; 103.784,83.287 104.902,83.287 ; 103.81,83.312 104.927,83.312 ; 103.81,84.734 104.14,84.734 ; 103.835,83.337 104.978,83.337 ; 103.886,83.363 105.029,83.363 ; 103.911,83.388 105.054,83.388 ; 103.962,83.414 105.105,83.414 ; 103.988,83.439 105.156,83.439 ; 104.013,83.464 105.207,83.464 ; 104.064,83.49 105.232,83.49 ; 104.089,83.515 105.283,83.515 ; 104.115,83.541 105.334,83.541 ; 104.165,83.566 105.359,83.566 ; 104.191,83.591 105.359,83.591 ; 104.216,83.617 105.359,83.617 ; 104.267,83.642 105.359,83.642 ; 104.292,82.804 105.918,82.804 ; 104.318,82.829 105.918,82.829 ; 104.318,83.668 105.334,83.668 ; 104.343,82.855 105.918,82.855 ; 104.343,83.693 105.334,83.693 ; 104.369,82.88 105.893,82.88 ; 104.394,83.718 105.308,83.718 ; 104.419,82.906 105.893,82.906 ; 104.419,83.744 105.283,83.744 ; 104.445,82.931 105.893,82.931 ; 104.445,83.769 105.283,83.769 ; 104.47,82.956 105.867,82.956 ; 104.496,82.982 105.867,82.982 ; 104.496,83.795 105.258,83.795 ; 104.521,83.82 105.258,83.82 ; 104.546,83.007 105.842,83.007 ; 104.572,83.033 105.842,83.033 ; 104.572,83.845 105.232,83.845 ; 104.623,83.058 105.842,83.058 ; 104.623,83.871 105.207,83.871 ; 104.648,83.083 105.842,83.083 ; 104.673,83.896 105.207,83.896 ; 104.699,83.109 105.816,83.109 ; 104.699,83.922 105.156,83.922 ; 104.724,83.134 105.816,83.134 ; 104.724,83.947 105.131,83.947 ; 104.75,83.972 105.08,83.972 ; 104.75,84.226 105.74,84.226 ; 104.75,84.252 105.74,84.252 ; 104.75,84.277 105.74,84.277 ; 104.75,84.303 105.74,84.303 ; 104.75,84.328 105.74,84.328 ; 104.75,84.353 105.74,84.353 ; 104.75,84.379 105.74,84.379 ; 104.75,84.404 105.74,84.404 ; 104.75,84.43 105.715,84.43 ; 104.75,84.455 105.715,84.455 ; 104.75,84.48 105.715,84.48 ; 104.75,84.506 105.689,84.506 ; 104.75,84.531 105.689,84.531 ; 104.75,84.557 105.664,84.557 ; 104.75,84.582 105.664,84.582 ; 104.775,83.16 105.816,83.16 ; 104.775,83.998 105.029,83.998 ; 104.775,84.607 105.664,84.607 ; 104.775,84.633 105.639,84.633 ; 104.775,84.658 105.639,84.658 ; 104.8,84.684 105.613,84.684 ; 104.8,84.709 105.613,84.709 ; 104.826,83.185 105.791,83.185 ; 104.826,84.734 105.613,84.734 ; 104.851,84.76 105.588,84.76 ; 104.851,84.785 105.588,84.785 ; 104.877,83.21 105.791,83.21 ; 104.877,84.811 105.562,84.811 ; 104.902,83.236 105.766,83.236 ; 104.902,84.201 105.74,84.201 ; 104.902,84.836 105.537,84.836 ; 104.927,84.861 105.512,84.861 ; 104.953,83.261 105.766,83.261 ; 104.953,84.176 105.74,84.176 ; 104.978,84.15 105.74,84.15 ; 104.978,84.887 105.461,84.887 ; 105.004,83.287 105.74,83.287 ; 105.004,84.912 105.41,84.912 ; 105.029,84.125 105.74,84.125 ; 105.054,83.312 105.715,83.312 ; 105.054,84.938 105.385,84.938 ; 105.08,84.099 105.74,84.099 ; 105.105,83.337 105.689,83.337 ; 105.131,84.074 105.74,84.074 ; 105.156,83.363 105.664,83.363 ; 105.181,84.049 105.74,84.049 ; 105.232,83.388 105.639,83.388 ; 105.232,84.023 105.715,84.023 ; 105.258,83.998 105.715,83.998 ; 105.283,83.414 105.588,83.414 ; 105.283,83.972 105.715,83.972 ; 105.308,83.947 105.715,83.947 ; 105.334,83.922 105.689,83.922 ; 105.359,83.871 105.689,83.871 ; 105.359,83.896 105.689,83.896 ; 105.385,83.82 105.689,83.82 ; 105.385,83.845 105.689,83.845 ; 105.41,83.795 105.689,83.795 ; 105.435,83.744 105.689,83.744 ; 105.435,83.769 105.689,83.769 ; 105.461,83.718 105.689,83.718 ; 105.486,82.271 105.969,82.271 ; 105.486,83.693 105.689,83.693 ; 105.512,83.668 105.689,83.668 ; 105.537,81.813 105.969,81.813 ; 105.537,81.839 105.969,81.839 ; 105.537,81.864 105.969,81.864 ; 105.537,81.89 105.969,81.89 ; 105.537,81.915 105.969,81.915 ; 105.537,81.94 105.969,81.94 ; 105.537,81.966 105.969,81.966 ; 105.537,81.991 105.969,81.991 ; 105.537,82.017 105.969,82.017 ; 105.537,82.042 105.969,82.042 ; 105.537,82.067 105.969,82.067 ; 105.537,82.093 105.969,82.093 ; 105.537,82.118 105.969,82.118 ; 105.537,82.144 105.969,82.144 ; 105.537,82.169 105.969,82.169 ; 105.537,82.194 105.969,82.194 ; 105.537,82.22 105.969,82.22 ; 105.537,82.245 105.969,82.245 ; 105.537,83.591 105.689,83.591 ; 105.537,83.617 105.689,83.617 ; 105.537,83.642 105.689,83.642 ; 105.562,81.763 105.969,81.763 ; 105.562,81.788 105.969,81.788 ; 105.562,83.541 105.689,83.541 ; 105.562,83.566 105.689,83.566 ; 105.588,81.712 105.969,81.712 ; 105.588,81.737 105.969,81.737 ; 105.588,83.515 105.689,83.515 ; 105.689,81.686 105.969,81.686 ; 105.74,81.661 105.969,81.661 ; 105.816,81.636 105.969,81.636

## Polygon pours and split planes (outlines as drawn)
GND on Top Layer "Top Layer-No Net" (solid, remove dead copper, pour order 4): 50.8,133.7 50.8,76.2 120.8,76.2 120.8,133.7 50.8,133.7

## Other copper
Top Layer:
  text "3.3V" at 88.722,98.755 h1.52
  text "Shield MMA8452 Rouge" at 66.116,84.303 h1.52
  text "Knocklet" at 66.116,81.61 h1.52
  text "By Nicolas LAW" at 66.116,79.477 h1.52
Internal Plane 1 (plane layer: these items are gaps in the copper):
  lines w0.254: 61.67,78.638 61.67,79.146 ; 63.194,78.384 61.67,78.892 ; 63.194,79.4 61.67,78.892 ; 78.538,78.892 61.67,78.892 ; 93.062,78.892 109.93,78.892 ; 108.406,78.384 109.93,78.892 ; 108.406,79.4 109.93,78.892 ; 109.93,78.638 109.93,79.146
  text "48.26 (mm)" at 78.792,77.978 h1.52

## Dimensions
50.8,76.2 to 120.8,76.2 on Mechanical 1
50.8,76.2 to 50.8,133.7 on Mechanical 1

## Text inside footprints (layer, text, board x,y; h text height)
P6: Top Overlay "1" at 53.542,127.152 h1.27 r270; Top Overlay "2" at 56.082,127.152 h1.27 r270
P7: Top Overlay "1" at 114.502,127.152 h1.27 r270; Top Overlay "2" at 117.042,127.152 h1.27 r270